# Altium PCB PCB.PcbDoc
Units mil, origin at the board's own origin, x right, y up, seen from the top; angles counter-clockwise.
Board outline 5765 x 4315 mil, 2 copper layers (Top Layer, Bottom Layer); 24 components, 36 nets, 130 pads, 12 vias.
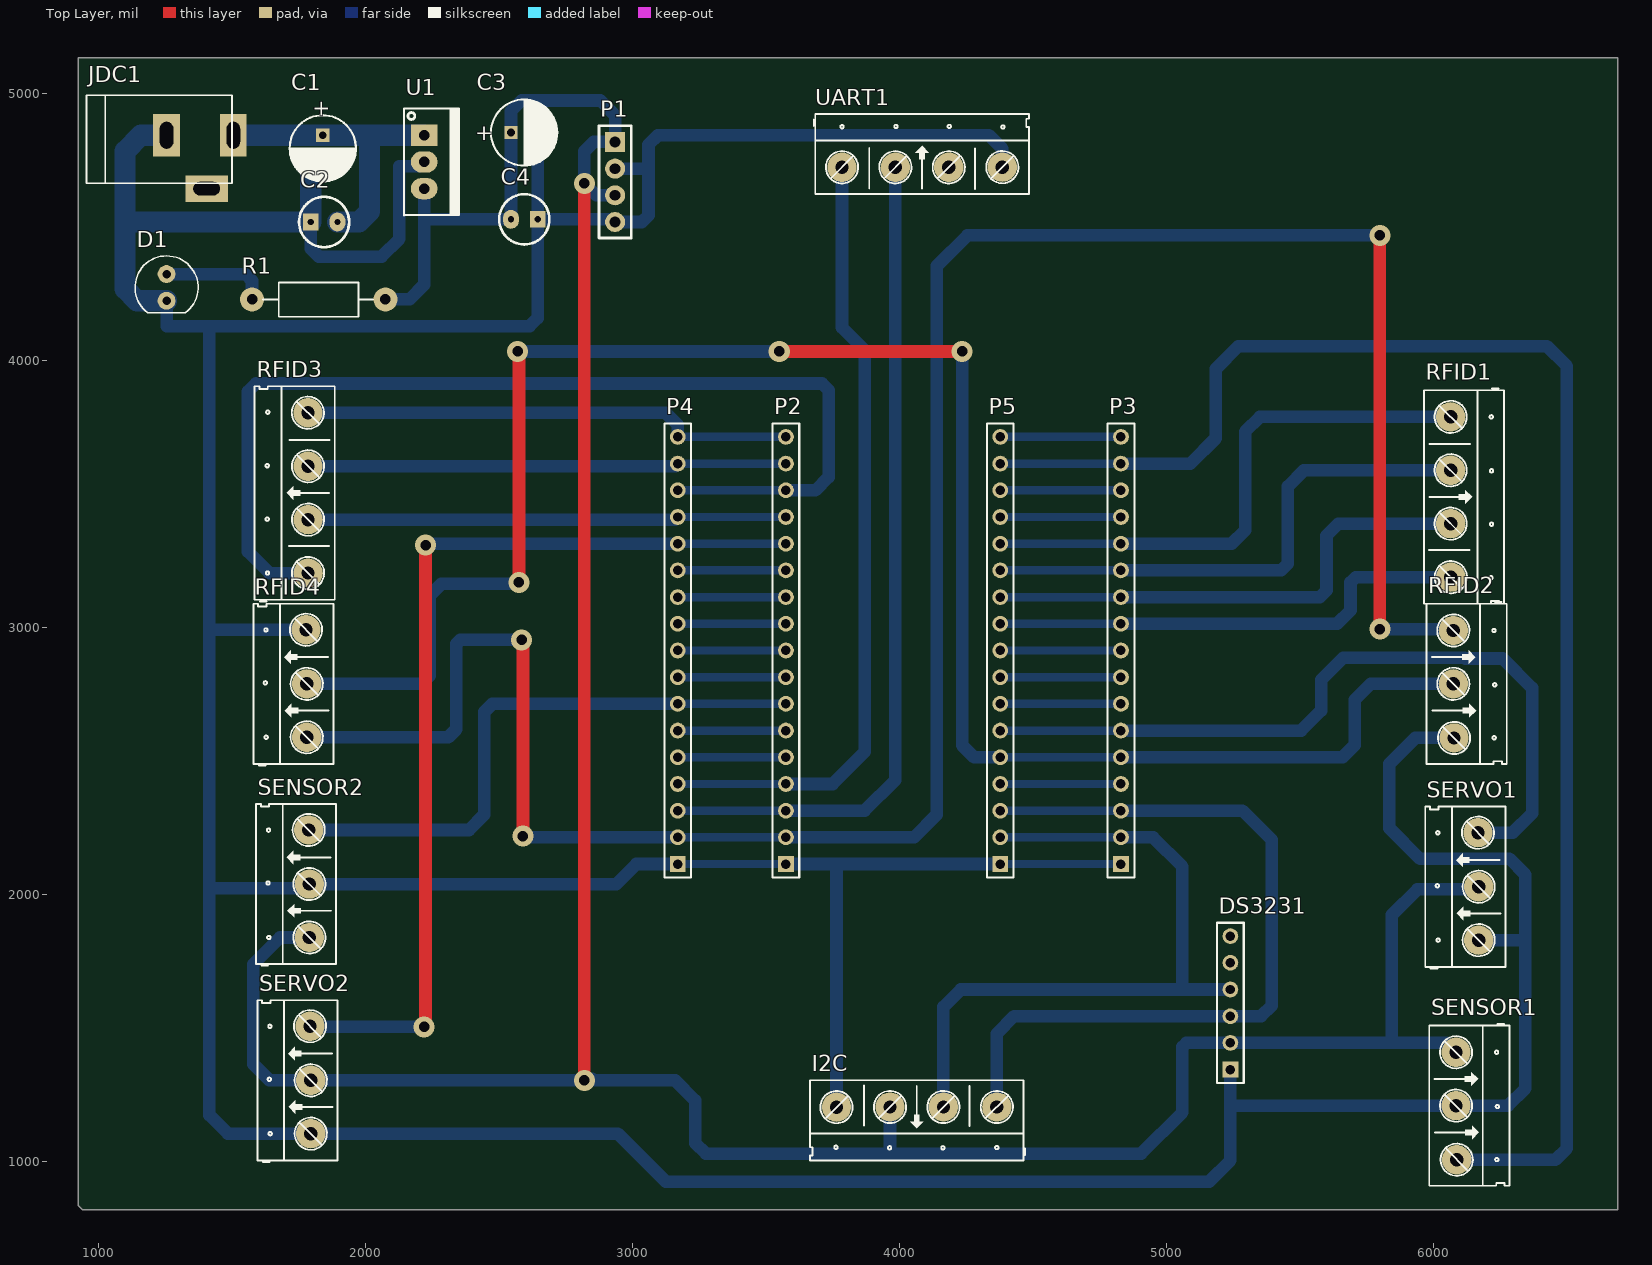
[diagram p0: Top Layer view]
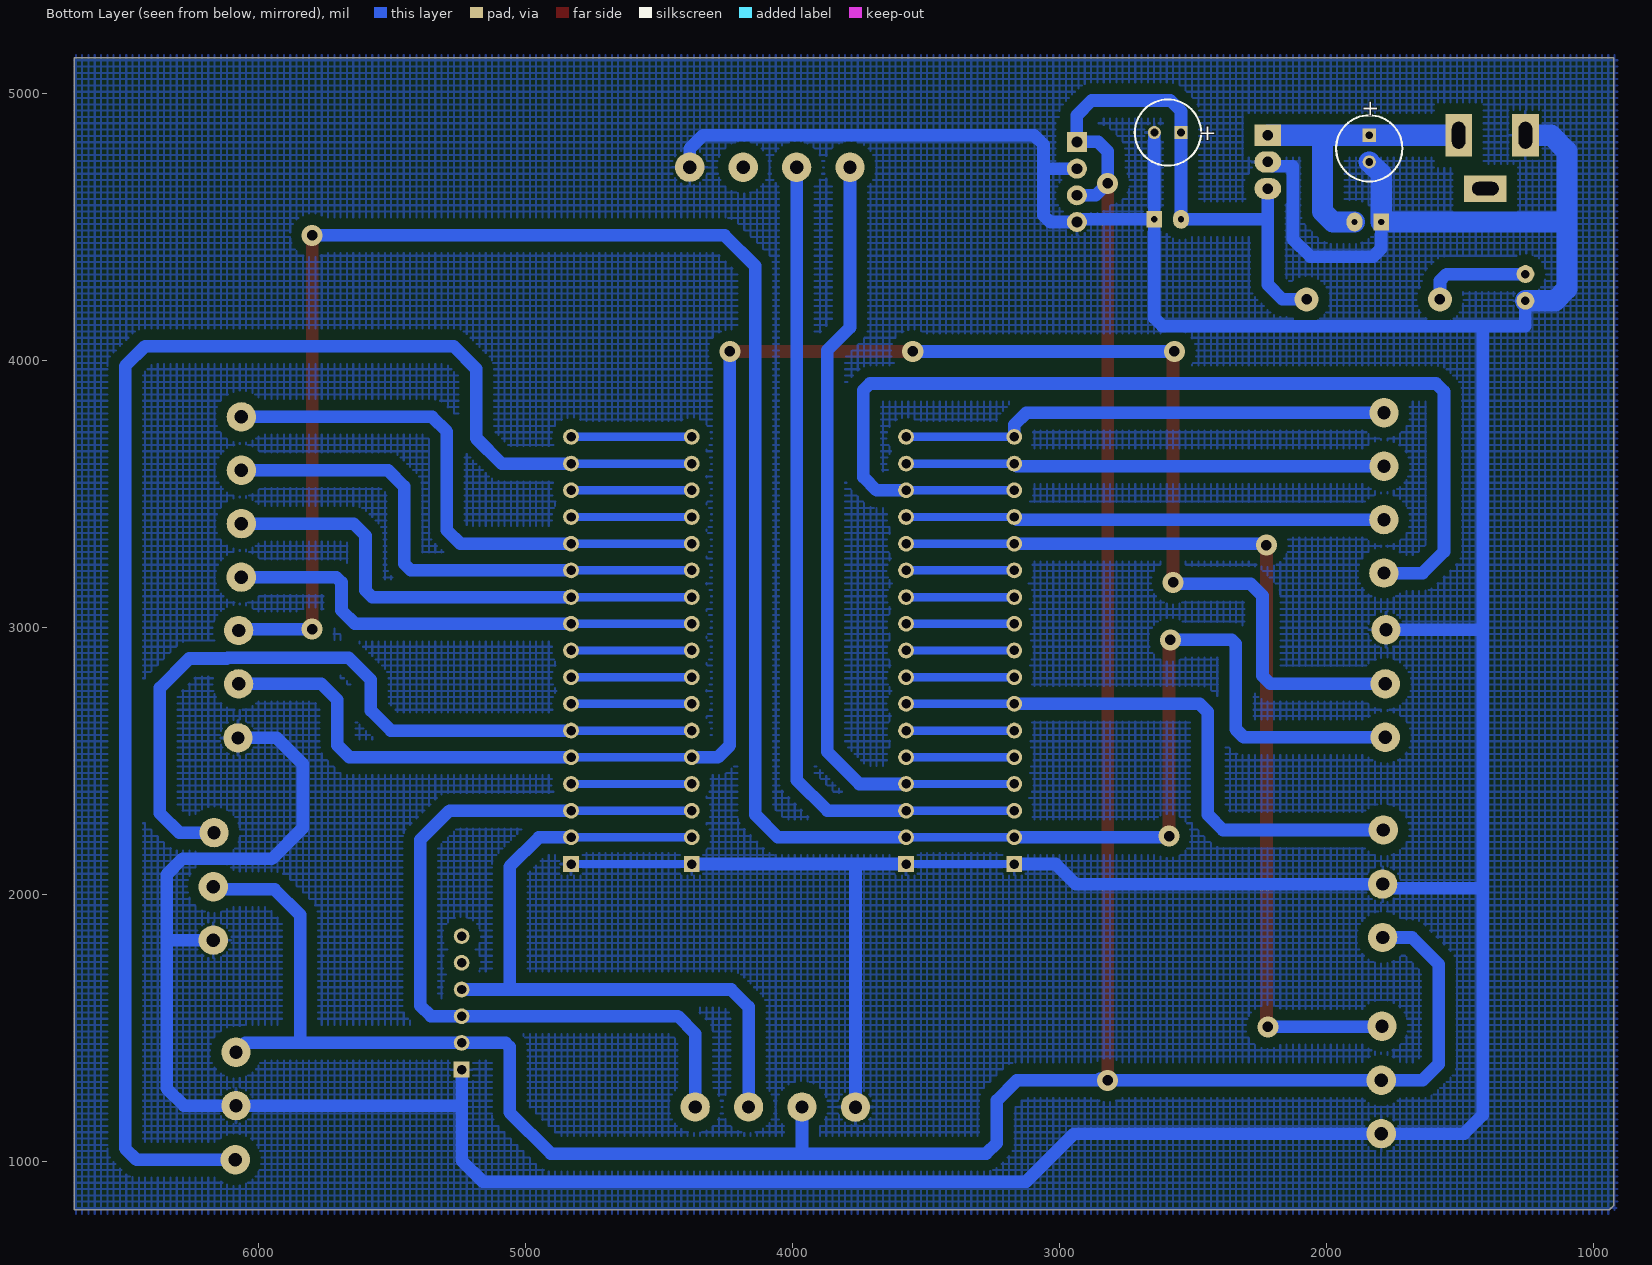
[diagram p1: Bottom Layer view, seen from below]

## Layer stack, top to bottom
Top Solder: solder mask 0.4, Solder Resist, Dk 3.5
Top Layer: signal copper 1.4
Dielectric 1: dielectric 12.6, FR-4, Dk 4.8
Bottom Layer: signal copper 1.4
Bottom Solder: solder mask 0.4, Solder Resist, Dk 3.5

## Board outline
930,5135 6690,5135 6690,820 940,820 925,835 925,5135

## Design rules (kind name [scope] priority, off if disabled: settings)
Clearance [All] p1: gap=19.68
PolygonConnect [All] p1: connectstyle=Relief reliefconductorwidth=10 reliefentries=4 polygonreliefangle="90 Angle" airgapwidth=10
RoutingVias [All] p1: holewidth=39.37 width=78.74 viastyle="Through Hole" minholewidth=39.37 minwidth=78.74 maxholewidth=39.37 maxwidth=78.74
SolderMaskExpansion [All] p1: expansion=4
Width [All] p1: maxlimit=78.74 minlimit=31.5 preferedwidth=47.24
30 further rules are at their usual default settings.

## Components (designator, comment, footprint, x,y, rotation, side; value= is the part's Value field where it differs from the comment)
C1 "Cap Pol" "RADIAL C" 1840,4845 r270 top
C2 "Cap" C3MM 1845,4520 r0 top
C3 "Cap Pol" "RADIAL C" 2545,4855 r0 top
C4 "104" C3MM 2595,4530 r180 top
D1 "LED" "LED-0 5mm BLUE" 1255,4275 r0 top
DS3231 "Header 6_1" HDR1X6 5240,1345 r90 top
I2C "Header 4" HED4 4365,1205 r180 top
JDC1 "Jac DC" DC-IN 1380,4745 r0 top
P1 "Header 4" "Header 4" 2935,4820 r270 top
P2 "Header 17" HDR1X17 3575,2115 r90 top
P3 "Header 17" HDR1X17 4830,2115 r90 top
P4 "Header 17" HDR1X17 3170,2115 r90 top
P5 "Header 17" HDR1X17 4378.11,2115 r90 top
R1 "100" R1W 2075,4230 r180 top
RFID1 "Header 4" HED4 6065,3790 r270 top
RFID2 "Header 3" HED3 6075,2990 r270 top
RFID3 "Header 4" HED4 1785,3205 r90 top
RFID4 "Header 3" HED3 1780,2590 r90 top
SENSOR1 "Header 3" HED3 6085,1410 r270 top
SENSOR2 "Header 3" HED3 1790,1840 r90 top
SERVO1 "Header 3" HED3 6170,1830 r90 top
SERVO2 "Header 3" HED3 1795,1105 r90 top
U1 "LM78xx" TO-220 2220,4845 r270 top
UART1 "Header 4" HED4 3785,4725 r0 top

## Footprints (in the part's own frame and the unit in brackets; to place one, negate y for a bottom-side part, rotate by r counter-clockwise, add the part's x,y. Pads: shape width x height; smd on the part's side, far side on the other; paste and mask are expansions set on the pad)
C3MM [mm]
  rect 1.5x1.58 hole 0.6: 1(-1.27,0)
  oval 1.5x1.8 hole 0.6: 2(1.27,0)
  silkscreen extent -2.39,-2.39 2.39,2.39, body extent -2,-2.03 1.99,1.97, height 7.01
DC-IN [mil] "Jac DC input"
  rect 100x160 hole 50 slot 100 at 90 deg: 1(125,100) 2(-125,100)
  rect 160x100 hole 50 slot 100 at 0 deg: 3(25,-100)
  silkscreen extent -425,-80 120,250, body extent -410,-105 134,269, height 434
HDR1X6 [mm] "Connector; Header; 6 Position"
  rect 1.5x1.5 hole 0.9: 1(0,0)
  round 1.5 hole 0.9: 2(2.54,0) 3(5.08,0) 4(7.62,0) 5(10.16,0) 6(12.7,0)
  silkscreen extent -1.27,-1.27 13.97,1.27
HDR1X17 [mm] "Connector; Header; 17 Position"
  rect 1.5x1.5 hole 0.9: 1(0,0)
  round 1.5 hole 0.9: 2(2.54,0) 3(5.08,0) 4(7.62,0) 5(10.16,0) 6(12.7,0) 7(15.24,0) 8(17.78,0) 9(20.32,0) 10(22.86,0) 11(25.4,0) 12(27.94,0) 13(30.48,0) 14(33.02,0) 15(35.56,0) 16(38.1,0) 17(40.64,0)
  silkscreen extent -1.27,-1.27 41.91,1.27
"Header 4" [mil] "Connector; Header; 4 Position; Solder Pad 35mil"
  rect 75x75 hole 40: 1(0,0)
  round 75 hole 40: 2(100,0) 3(200,0) 4(300,0)
  silkscreen extent -60,-60 360,60, body extent -50,-50 350,50, height 330
HED3 [mil] "Header 3, 3 pin, hight 300mil, Pin to Pin 200, Colour Green"
  round 110 hole 50: 1(0,0) 2(200,0) 3(402.62,2.62)
  silkscreen extent -106,-100 500,200
HED4 [mil] "Header 4, 4 pin, hight 300mil, Pin to Pin 200, Colour Green"
  round 110 hole 50: 1(0,0) 2(200,0) 3(400.06,0.06) 4(600.39,0.39)
  silkscreen extent -106,-100 700,200
"LED-0 5mm BLUE" [mil] "Typical LED; BLUE; 2 Leads; Solder Pad 35mil"
  round 67 hole 32: 1(0,50) 2(0,-50)
  silkscreen extent -118,-96 118,118, body extent -118,-96 119,117, height 345
R1W [mil] "R 1W, 2 pin, 500mil"
  round 90 hole 39.37: 1(0,0) 2(500,0)
  silkscreen extent 46,-63 460,65
"RADIAL C" [mm] "Capacitor, Electrolytic, Radial; Body 6.3 x 6.8 mm (Dia.xH typ); Pin Spacing 2.5 mm (typ)"
  rect 1.25x1.25 hole 0.75: 1(0,0)
  round 1.25 hole 0.75: 2(2.54,0)
  silkscreen extent -1.9,-3.15 4.4,3.15, body extent -1.27,-2.54 3.81,2.54, height 13.7
TO-220 [mil] "TO-220 - 1-2-3"
  rect 80x100 hole 39: 1(0,0)
  oval 80x100 hole 39: 2(100,0) 3(200,0)
  silkscreen extent -100,-76 300,130, body extent -119,-64 322,121, height 755

## Part data
C1 C3: "Polarized Capacitor"
C2: "Capacitor"
C4: library part Cap, "Capacitor"
D1: "Typical LED"
DS3231: "Header, 6-Pin"
I2C RFID1 RFID3 UART1: library part Hed4, "Header 4 (Green)"
JDC1: library part DCIN, "Jac DC input"
P1: "Header, 4-Pin"
P2 P3 P4 P5: "Header, 17-Pin"
R1: library part R1W, "Resistor 1W"
RFID2 RFID4 SENSOR1 SENSOR2 SERVO1 SERVO2: library part Hed3, "Header 3 (Green)"
U1: "Regulator"

## Via types
v1: diameter 78.74, hole 39.37, Top Layer to Bottom Layer, 12 vias

## Nets (pads, with @x,y where several pads share a name; then routed paths per layer and width w, separated by ;. In a path a pad name is that pad's centre, name@x,y a point inside that pad or via, vN(x,y) a via of type N, cw(c..) or ccw(c..) an arc to the next point about the centre after c; other vN are vias at no path point)
5V: C3.1 C4.2 DS3231.2 I2C.3 P1.1 P1.3 R1.1 SENSOR1.1 SENSOR2.1 SERVO1.2 SERVO2.2 U1.3 | length 12330.7
  Top Layer w47.24: v1(2820,1305) v1(2820,4665)
  Bottom Layer w47.24: SENSOR2.1 1680,1840 1580,1740 1580,1365 1640,1305 SERVO2.2 v1@2855,1305 ; R1.1 2165,4230 2220,4285 2220,4520 ; U1.3 2220,4520 ; v1(2820,1305) 2845,1305 2850,1310 v1@2855,1305 ; P1.3 2865,4620 v1(2820,4665) 2820,4785 2855,4820 P1.1 2935,4920 2880,4975 2585,4975 2545,4935 C3.1 C4.2 2230,4530 2220,4520 ; 3964.94,1069.94 3964.94,1030 ; I2C.3 3964.94,1030 ; SENSOR1.1 6050,1445 5845,1445 ; SERVO1.2 6160,2020 5940,2020 5845,1925 5845,1445 ; v1@2855,1305 3160,1305 3235,1230 3235,1070 3275,1030 3964.94,1030 ; 3964.94,1030 4905,1030 5060,1185 5060,1430 5075,1445 DS3231.2 5845,1445
GND: C1.2 C2.1 C3.2 C4.1 D1.2 DS3231.1 I2C.4 JDC1.2 P1.2 P1.4 P2.1 P3.1 P4.1 P5.1 RFID2.3 RFID4.3 SENSOR1.2 SENSOR2.2 SERVO1.1 SERVO2.1 U1.2 UART1.4 | length 22428.3
  Bottom Layer w31.5: P4.1 P2.1 ; P5.1 P3.1
  Bottom Layer w47.24: D1.2 1255,4130 1415,4130 ; RFID4.3 1415,2992.62 ; C2.1 1795,4420 1825,4390 2060,4390 2126.69,4456.69 2126.69,4728.31 2203.31,4728.31 U1.2 ; C3.2 C4.1 ; P1.2 3060,4720 ; P4.1 3015,2115 2940,2040 SENSOR2.2 1775,2025 1415,2025 ; P2.1 3750,2115 ; I2C.4 3764.61,2100.39 3750,2115 ; P5.1 3750,2115 ; UART1.4 4385.39,4794.61 4335,4845 3095,4845 3060,4810 3060,4545 3035,4520 P1.4 2925,4530 C4.1 ; RFID2.3 5932.38,2587.38 5835,2490 5835,2250 5950.69,2134.31 6208.1,2134.31 6208.79,2135 6285,2135 6345,2075 6345,1275 6280,1210 SENSOR1.2 5240,1210 DS3231.1 5240,1005 5160,925 3125,925 2945,1105 SERVO2.1 1485,1105 1415,1175 1415,2025 ; SERVO1.1 6345,1830 ; 1415,2025 1415,2992.62 ; 1415,2992.62 1415,4130 ; 1415,4130 2615,4130 2645,4160 C4.1
  Bottom Layer w78.74: D1.2 1145,4225 1100,4270 1100,4520 ; JDC1.2 1160,4845 1100,4785 1100,4520 ; C1.2 1795,4700 C2.1 1100,4520
NetC1_1: C1.1 C2.2 JDC1.1 U1.1 | length 1136.6
  Bottom Layer w78.74: JDC1.1 C1.1 2015,4845 ; C2.2 1975,4520 2015,4560 2015,4845 ; U1.1 2015,4845
NetD1_1: D1.1 R1.2 | length 400.4
  Bottom Layer w47.24: D1.1 1550,4325 1575,4300 R1.2
NetDS3231_3: DS3231.3 I2C.1 P3.3 P5.3 | length 3030.9
  Bottom Layer w31.5: P5.3 P3.3
  Bottom Layer w47.24: I2C.1 4365,1480 4430,1545 DS3231.3 5355,1545 5395,1585 5395,2205 5285,2315 P3.3
NetDS3231_4: DS3231.4 I2C.2 P3.2 P5.2 | length 2664.4
  Bottom Layer w31.5: P5.2 P3.2
  Bottom Layer w47.24: I2C.2 4165,1580 4230,1645 5060,1645 ; P3.2 4950,2215 5060,2105 5060,1645 ; DS3231.4 5060,1645
NetP2_2: P2.2 P4.2 RFID2.1 RFID4.1 | length 8982.7
  Top Layer w47.24: v1(2585,2955) 2590,2950 v1(2590,2220) ; v1(5800,2995) v1(5800,4470)
  Bottom Layer w31.5: P4.2 P2.2
  Bottom Layer w47.24: RFID4.1 2310,2590 2340,2620 2340,2940 2355,2955 v1(2585,2955) ; v1(2590,2220) 2595,2215 P4.2 ; P2.2 4055,2215 4140,2300 4140,4355 4255,4470 v1(5800,4470) ; v1(5800,2995) 6070,2995 RFID2.1
NetP2_3: P2.3 P4.3 UART1.2 | length 3157.6
  Bottom Layer w31.5: P4.3 P2.3
  Bottom Layer w47.24: P2.3 3870,2315 3985,2430 UART1.2
NetP2_4: P2.4 P4.4 UART1.1 | length 2974.9
  Bottom Layer w31.5: P4.4 P2.4
  Bottom Layer w47.24: P2.4 3750,2415 3870,2535 3870,4040 3785,4125 UART1.1
NetP2_5: P2.5 P4.5 | length 405
  Bottom Layer w31.5: P4.5 P2.5
NetP2_6: P2.6 P4.6 | length 405
  Bottom Layer w31.5: P4.6 P2.6
NetP2_7: P2.7 P4.7 SENSOR2.3 | length 2208.8
  Bottom Layer w31.5: P4.7 P2.7
  Bottom Layer w47.24: SENSOR2.3 2387.62,2242.62 2445,2300 2445,2685 2475,2715 P4.7
NetP2_8: P2.8 P4.8 | length 405
  Bottom Layer w31.5: P4.8 P2.8
NetP2_9: P2.9 P4.9 | length 405
  Bottom Layer w31.5: P4.9 P2.9
NetP2_10: P2.10 P4.10 | length 405
  Bottom Layer w31.5: P4.10 P2.10
NetP2_11: P2.11 P4.11 | length 405
  Bottom Layer w31.5: P4.11 P2.11
NetP2_12: P2.12 P4.12 | length 405
  Bottom Layer w31.5: P4.12 P2.12
NetP2_13: P2.13 P4.13 SERVO2.3 | length 3587.8
  Top Layer w47.24: v1(2220,1505) 2225,1510 v1(2225,3310)
  Bottom Layer w31.5: P4.13 P2.13
  Bottom Layer w47.24: SERVO2.3 1795,1505 v1(2220,1505) ; v1(2225,3310) 2230,3315 P4.13
NetP2_14: P2.14 P4.14 RFID3.2 | length 1794.1
  Bottom Layer w31.5: P4.14 P2.14
  Bottom Layer w47.24: RFID3.2 3160,3405 P4.14
NetP2_15: P2.15 P4.15 RFID3.1 | length 3966.6
  Bottom Layer w31.5: P4.15 P2.15
  Bottom Layer w47.24: RFID3.1 1640,3205 1560,3285 1560,3885 1590,3915 3710,3915 3735,3890 3735,3565 3685,3515 P2.15
NetP2_16: P2.16 P4.16 RFID3.3 | length 1796.4
  Bottom Layer w0: P2.16 P2.16@3576.57,3616.57
  Bottom Layer w31.5: P4.16 P2.16
  Bottom Layer w47.24: RFID3.3 3160.06,3605.06 P4.16
NetP2_17: P2.17 P4.17 RFID3.4 | length 1854.2
  Bottom Layer w31.5: P4.17 P2.17
  Bottom Layer w47.24: RFID3.4 3124.61,3805.39 3170,3760 P4.17
NetP3_4: P3.4 P5.4 | length 451.9
  Bottom Layer w31.5: P5.4 P3.4
NetP3_5: P3.5 P5.5 RFID2.2 RFID4.2 | length 7217.3
  Top Layer w47.24: v1(2570,4035) 2575,4030 v1(2575,3170) ; v1(3550,4035) v1(4235,4035)
  Bottom Layer w31.5: P5.5 P3.5
  Bottom Layer w47.24: RFID4.2 2210,2790 2240,2820 2240,3120 2285,3165 2580,3165 v1(2575,3170) ; v1(2570,4035) v1(3550,4035) ; v1(4235,4035) 4235,2560 4280,2515 P5.5 ; P3.5 5660,2515 5705,2560 5705,2730 5765,2790 RFID2.2
NetP3_6: P3.6 P5.6 SERVO1.3 | length 2922
  Bottom Layer w31.5: P5.6 P3.6
  Bottom Layer w47.24: P3.6 5505,2615 5580,2690 5580,2805 5663.31,2888.31 6115.72,2888.31 6119.03,2885 6260,2885 6370,2775 6370,2305 6297.62,2232.62 SERVO1.3
NetP3_7: P3.7 P5.7 | length 451.9
  Bottom Layer w31.5: P5.7 P3.7
NetP3_8: P3.8 P5.8 | length 451.9
  Bottom Layer w31.5: P5.8 P3.8
NetP3_9: P3.9 P5.9 | length 451.9
  Bottom Layer w31.5: P5.9 P3.9
NetP3_10: P3.10 P5.10 RFID1.4 | length 1821.1
  Bottom Layer w31.5: P5.10 P3.10
  Bottom Layer w47.24: P3.10 5640,3015 5690,3065 5690,3170 5709.61,3189.61 RFID1.4
NetP3_11: P3.11 P5.11 RFID1.3 | length 1920.9
  Bottom Layer w31.5: P5.11 P3.11
  Bottom Layer w47.24: P3.11 5575,3115 5600,3140 5600,3345 5644.94,3389.94 RFID1.3
NetP3_12: P3.12 P5.12 RFID1.2 | length 2012.1
  Bottom Layer w31.5: P5.12 P3.12
  Bottom Layer w47.24: P3.12 5430,3215 5455,3240 5455,3530 5515,3590 RFID1.2
NetP3_13: P3.13 P5.13 RFID1.1 | length 2100.4
  Bottom Layer w31.5: P5.13 P3.13
  Bottom Layer w47.24: P3.13 5245,3315 5295,3365 5295,3735 5350,3790 RFID1.1
NetP3_14: P3.14 P5.14 | length 451.9
  Bottom Layer w31.5: P5.14 P3.14
NetP3_15: P3.15 P5.15 | length 451.9
  Bottom Layer w31.5: P5.15 P3.15
NetP3_16: P3.16 P5.16 SENSOR1.3 | length 5847.5
  Bottom Layer w31.5: P5.16 P3.16
  Bottom Layer w47.24: P3.16 5090,3615 5185,3710 5185,3970 5270,4055 6425,4055 6500,3980 6500,1050 6457.38,1007.38 SENSOR1.3
NetP3_17: P3.17 P5.17 | length 451.9
  Bottom Layer w31.5: P5.17 P3.17
pads on no net: DS3231.5 DS3231.6 JDC1.3 UART1.3

## Polygon pours and split planes (outlines as drawn)
GND on Bottom Layer "Bottom Layer-No Net" (hatched 90Degree grid 23.62 track 7.87, pour order 2): 910,5145 6690,5145 6690,805 935,805 920,820 910,830 910,5155

## Text inside footprints (layer, text, board x,y; h text height)
C1: Top Overlay "+" at 1810.47,4977.87 h59.06 r270; Bottom Overlay "+" at 1810.47,4977.87 h59.06 r270
C3: Top Overlay "+" at 2412.13,4825.47 h59.06; Bottom Overlay "+" at 2412.13,4825.47 h59.06